# Altium PCB PCB3.PcbDoc (part 2 of 4)
Units mil, origin at the board's own origin, x right, y up, seen from the top; angles counter-clockwise.
Board outline 6000 x 4000 mil, 2 copper layers (Top Layer, Bottom Layer); 365 components, 395 nets, 1535 pads, 0 vias.
Unrouted connection lines stored in the file: 834.
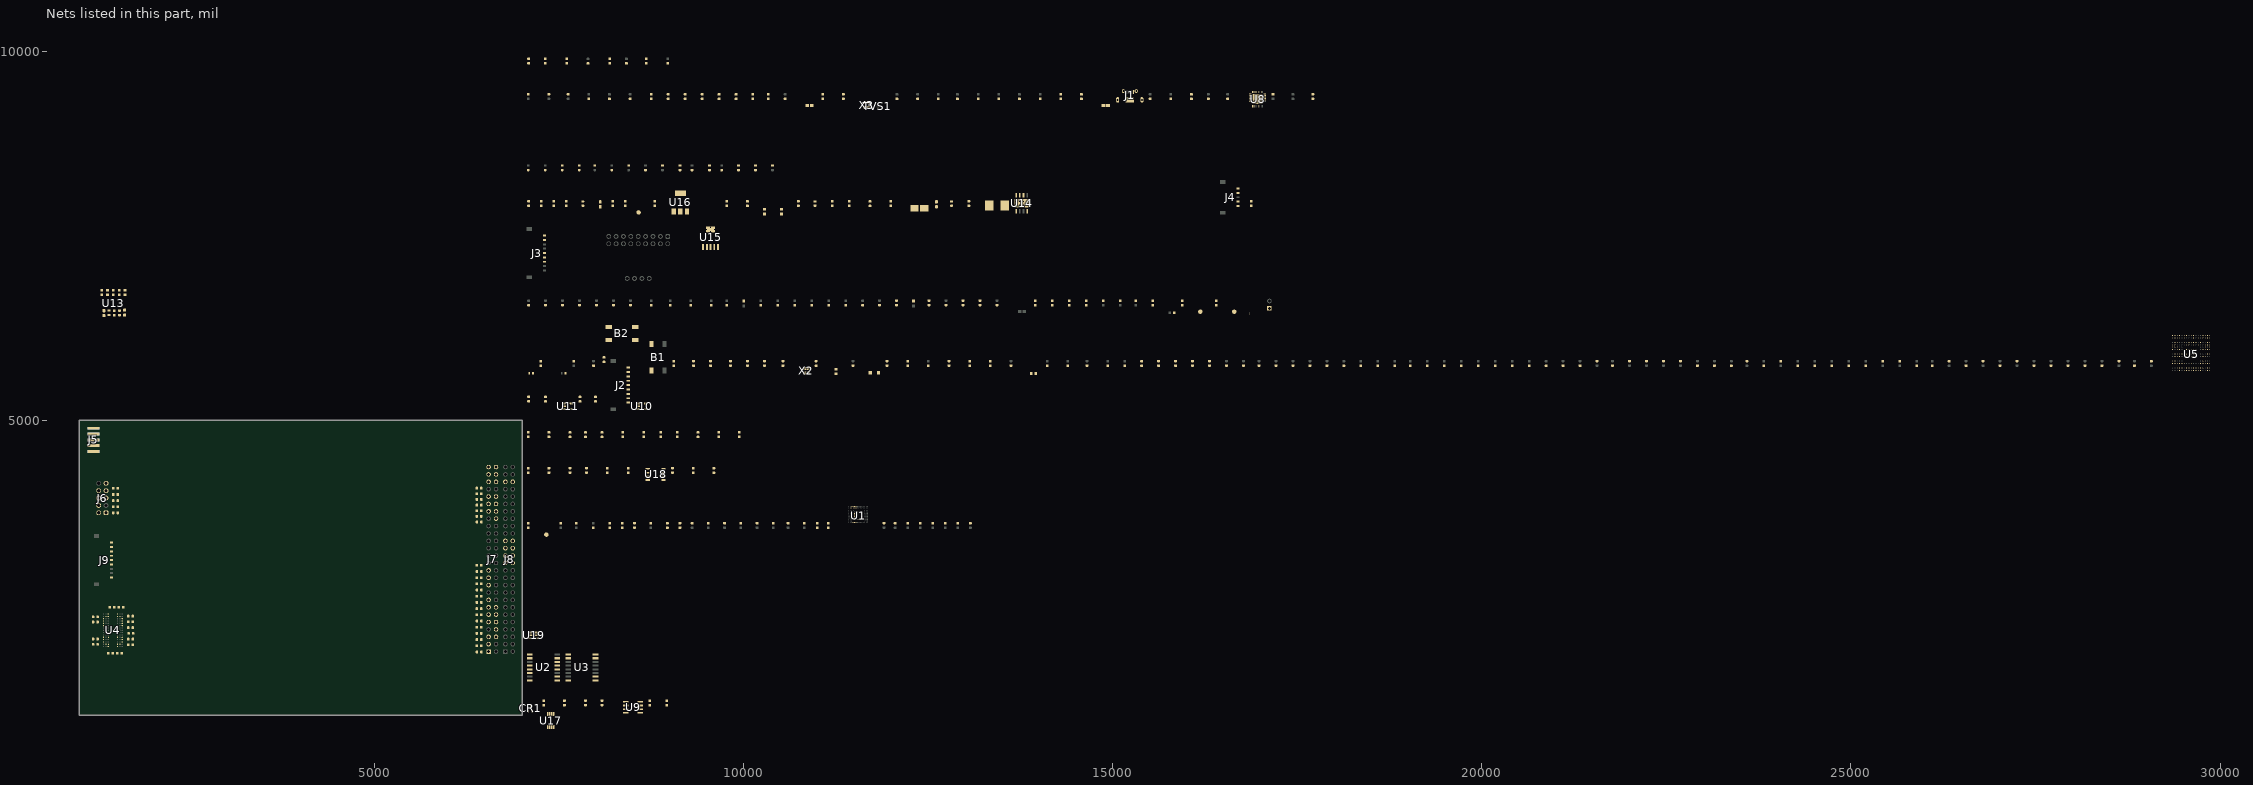
[diagram p2: the nets of this part, all layers, seen from the top]

## Footprints (in the part's own frame and the unit in brackets; to place one, negate y for a bottom-side part, rotate by r counter-clockwise, add the part's x,y. Pads: shape width x height; smd on the part's side, far side on the other; paste and mask are expansions set on the pad) (continued)
IC_TPS25974ARPWR [mm]
  rect 0.1x0.1 smd paste-1 mask+0: 1(-0.725,0.875) 2(-0.9,0.225) 3(-0.9,-0.225) 4(-0.725,-0.875) 5(-0.25,0) 6(0.25,0) 7(0.725,-0.875) 8(0.9,-0.225) 9(0.9,0.225) 10(0.725,0.875)
  Top Layer region: 1.158,-0.101 1.16,-0.101 1.163,-0.102 1.165,-0.102 1.168,-0.103 1.17,-0.104 1.173,-0.105 1.175,-0.107 1.177,-0.108 1.179,-0.11 1.181,-0.111 1.183,-0.113 1.185,-0.115 1.187,-0.117 1.189,-0.119 1.19,-0.121 1.192,-0.123 1.193,-0.125 1.195,-0.127 1.196,-0.13 1.197,-0.132 1.198,-0.135 1.198,-0.137 1.199,-0.14 1.199,-0.142 1.2,-0.145 1.2,-0.147 1.2,-0.15 1.2,-0.3 1.2,-0.303 1.2,-0.305 1.199,-0.308 1.199,-0.31 1.198,-0.313 1.198,-0.315 1.197,-0.318 1.196,-0.32 1.195,-0.323 1.193,-0.325 1.192,-0.327 1.19,-0.329 1.189,-0.331 1.187,-0.333 1.185,-0.335 1.183,-0.337 1.181,-0.339 1.179,-0.34 1.177,-0.342 1.175,-0.343 1.173,-0.345 1.17,-0.346 1.168,-0.347 1.165,-0.348 1.163,-0.348 1.16,-0.349 1.158,-0.349 1.155,-0.35 0.645,-0.35 0.642,-0.349 0.64,-0.349 0.637,-0.348 0.635,-0.348 0.632,-0.347 0.63,-0.346 0.627,-0.345 0.625,-0.343 0.623,-0.342 0.621,-0.34 0.619,-0.339 0.617,-0.337 0.615,-0.335 0.613,-0.333 0.611,-0.331 0.61,-0.329 0.608,-0.327 0.607,-0.325 0.605,-0.323 0.604,-0.32 0.603,-0.318 0.602,-0.315 0.602,-0.313 0.601,-0.31 0.601,-0.308 0.6,-0.305 0.6,-0.303 0.6,-0.3 0.6,-0.15 0.6,-0.147 0.6,-0.145 0.601,-0.142 0.601,-0.14 0.602,-0.137 0.602,-0.135 0.603,-0.132 0.604,-0.13 0.605,-0.127 0.607,-0.125 0.608,-0.123 0.61,-0.121 0.611,-0.119 0.613,-0.117 0.615,-0.115 0.617,-0.113 0.619,-0.111 0.621,-0.11 0.623,-0.108 0.625,-0.107 0.627,-0.105 0.63,-0.104 0.632,-0.103 0.635,-0.102 0.637,-0.102 0.64,-0.101 0.642,-0.101 0.645,-0.1 1.155,-0.1
  Top Layer region: 0.358,1.199 0.36,1.199 0.363,1.198 0.365,1.198 0.368,1.197 0.37,1.196 0.373,1.195 0.375,1.193 0.377,1.192 0.379,1.19 0.381,1.189 0.383,1.187 0.385,1.185 0.387,1.183 0.389,1.181 0.39,1.179 0.392,1.177 0.393,1.175 0.395,1.173 0.396,1.17 0.397,1.168 0.398,1.165 0.398,1.163 0.399,1.16 0.399,1.158 0.4,1.155 0.4,1.153 0.4,1.15 0.4,-1.15 0.4,-1.153 0.4,-1.155 0.399,-1.158 0.399,-1.16 0.398,-1.163 0.398,-1.165 0.397,-1.168 0.396,-1.17 0.395,-1.173 0.393,-1.175 0.392,-1.177 0.39,-1.179 0.389,-1.181 0.387,-1.183 0.385,-1.185 0.383,-1.187 0.381,-1.189 0.379,-1.19 0.377,-1.192 0.375,-1.193 0.373,-1.195 0.37,-1.196 0.368,-1.197 0.365,-1.198 0.363,-1.198 0.36,-1.199 0.358,-1.199 0.355,-1.2 0.145,-1.2 0.142,-1.199 0.14,-1.199 0.137,-1.198 0.135,-1.198 0.132,-1.197 0.13,-1.196 0.127,-1.195 0.125,-1.193 0.123,-1.192 0.121,-1.19 0.119,-1.189 0.117,-1.187 0.115,-1.185 0.113,-1.183 0.111,-1.181 0.11,-1.179 0.108,-1.177 0.107,-1.175 0.105,-1.173 0.104,-1.17 0.103,-1.168 0.102,-1.165 0.102,-1.163 0.101,-1.16 0.101,-1.158 0.1,-1.155 0.1,-1.153 0.1,-1.15 0.1,1.15 0.1,1.153 0.1,1.155 0.101,1.158 0.101,1.16 0.102,1.163 0.102,1.165 0.103,1.168 0.104,1.17 0.105,1.173 0.107,1.175 0.108,1.177 0.11,1.179 0.111,1.181 0.113,1.183 0.115,1.185 0.117,1.187 0.119,1.189 0.121,1.19 0.123,1.192 0.125,1.193 0.127,1.195 0.13,1.196 0.132,1.197 0.135,1.198 0.137,1.198 0.14,1.199 0.142,1.199 0.145,1.2 0.355,1.2
  Top Layer region: -0.142,1.199 -0.14,1.199 -0.137,1.198 -0.135,1.198 -0.132,1.197 -0.13,1.196 -0.127,1.195 -0.125,1.193 -0.123,1.192 -0.121,1.19 -0.119,1.189 -0.117,1.187 -0.115,1.185 -0.113,1.183 -0.111,1.181 -0.11,1.179 -0.108,1.177 -0.107,1.175 -0.105,1.173 -0.104,1.17 -0.103,1.168 -0.102,1.165 -0.102,1.163 -0.101,1.16 -0.101,1.158 -0.1,1.155 -0.1,1.153 -0.1,1.15 -0.1,-1.15 -0.1,-1.153 -0.1,-1.155 -0.101,-1.158 -0.101,-1.16 -0.102,-1.163 -0.102,-1.165 -0.103,-1.168 -0.104,-1.17 -0.105,-1.173 -0.107,-1.175 -0.108,-1.177 -0.11,-1.179 -0.111,-1.181 -0.113,-1.183 -0.115,-1.185 -0.117,-1.187 -0.119,-1.189 -0.121,-1.19 -0.123,-1.192 -0.125,-1.193 -0.127,-1.195 -0.13,-1.196 -0.132,-1.197 -0.135,-1.198 -0.137,-1.198 -0.14,-1.199 -0.142,-1.199 -0.145,-1.2 -0.355,-1.2 -0.358,-1.199 -0.36,-1.199 -0.363,-1.198 -0.365,-1.198 -0.368,-1.197 -0.37,-1.196 -0.373,-1.195 -0.375,-1.193 -0.377,-1.192 -0.379,-1.19 -0.381,-1.189 -0.383,-1.187 -0.385,-1.185 -0.387,-1.183 -0.389,-1.181 -0.39,-1.179 -0.392,-1.177 -0.393,-1.175 -0.395,-1.173 -0.396,-1.17 -0.397,-1.168 -0.398,-1.165 -0.398,-1.163 -0.399,-1.16 -0.399,-1.158 -0.4,-1.155 -0.4,-1.153 -0.4,-1.15 -0.4,1.15 -0.4,1.153 -0.4,1.155 -0.399,1.158 -0.399,1.16 -0.398,1.163 -0.398,1.165 -0.397,1.168 -0.396,1.17 -0.395,1.173 -0.393,1.175 -0.392,1.177 -0.39,1.179 -0.389,1.181 -0.387,1.183 -0.385,1.185 -0.383,1.187 -0.381,1.189 -0.379,1.19 -0.377,1.192 -0.375,1.193 -0.373,1.195 -0.37,1.196 -0.368,1.197 -0.365,1.198 -0.363,1.198 -0.36,1.199 -0.358,1.199 -0.355,1.2 -0.145,1.2
  Top Layer region: -0.642,-0.551 -0.64,-0.551 -0.637,-0.552 -0.635,-0.552 -0.632,-0.553 -0.63,-0.554 -0.627,-0.555 -0.625,-0.557 -0.623,-0.558 -0.621,-0.56 -0.619,-0.561 -0.617,-0.563 -0.615,-0.565 -0.613,-0.567 -0.611,-0.569 -0.61,-0.571 -0.608,-0.573 -0.607,-0.575 -0.605,-0.577 -0.604,-0.58 -0.603,-0.582 -0.602,-0.585 -0.602,-0.587 -0.601,-0.59 -0.601,-0.592 -0.6,-0.595 -0.6,-0.597 -0.6,-0.6 -0.6,-1.15 -0.6,-1.153 -0.6,-1.155 -0.601,-1.158 -0.601,-1.16 -0.602,-1.163 -0.602,-1.165 -0.603,-1.168 -0.604,-1.17 -0.605,-1.173 -0.607,-1.175 -0.608,-1.177 -0.61,-1.179 -0.611,-1.181 -0.613,-1.183 -0.615,-1.185 -0.617,-1.187 -0.619,-1.189 -0.621,-1.19 -0.623,-1.192 -0.625,-1.193 -0.627,-1.195 -0.63,-1.196 -0.632,-1.197 -0.635,-1.198 -0.637,-1.198 -0.64,-1.199 -0.642,-1.199 -0.645,-1.2 -0.805,-1.2 -0.808,-1.199 -0.81,-1.199 -0.813,-1.198 -0.815,-1.198 -0.818,-1.197 -0.82,-1.196 -0.823,-1.195 -0.825,-1.193 -0.827,-1.192 -0.829,-1.19 -0.831,-1.189 -0.833,-1.187 -0.835,-1.185 -0.837,-1.183 -0.839,-1.181 -0.84,-1.179 -0.842,-1.177 -0.843,-1.175 -0.845,-1.173 -0.846,-1.17 -0.847,-1.168 -0.848,-1.165 -0.848,-1.163 -0.849,-1.16 -0.849,-1.158 -0.85,-1.155 -0.85,-1.153 -0.85,-1.15 -0.85,-0.85 -1.155,-0.85 -1.158,-0.849 -1.16,-0.849 -1.163,-0.848 -1.165,-0.848 -1.168,-0.847 -1.17,-0.846 -1.173,-0.845 -1.175,-0.843 -1.177,-0.842 -1.179,-0.84 -1.181,-0.839 -1.183,-0.837 -1.185,-0.835 -1.187,-0.833 -1.189,-0.831 -1.19,-0.829 -1.192,-0.827 -1.193,-0.825 -1.195,-0.823 -1.196,-0.82 -1.197,-0.818 -1.198,-0.815 -1.198,-0.813 -1.199,-0.81 -1.199,-0.808 -1.2,-0.805 -1.2,-0.803 -1.2,-0.8 -1.2,-0.6 -1.2,-0.597 -1.2,-0.595 -1.199,-0.592 -1.199,-0.59 -1.198,-0.587 -1.198,-0.585 -1.197,-0.582 -1.196,-0.58 -1.195,-0.577 -1.193,-0.575 -1.192,-0.573 -1.19,-0.571 -1.189,-0.569 -1.187,-0.567 -1.185,-0.565 -1.183,-0.563 -1.181,-0.561 -1.179,-0.56 -1.177,-0.558 -1.175,-0.557 -1.173,-0.555 -1.17,-0.554 -1.168,-0.553 -1.165,-0.552 -1.163,-0.552 -1.16,-0.551 -1.158,-0.551 -1.155,-0.55 -0.645,-0.55
  Top Layer region: 0.808,1.199 0.81,1.199 0.813,1.198 0.815,1.198 0.818,1.197 0.82,1.196 0.823,1.195 0.825,1.193 0.827,1.192 0.829,1.19 0.831,1.189 0.833,1.187 0.835,1.185 0.837,1.183 0.839,1.181 0.84,1.179 0.842,1.177 0.843,1.175 0.845,1.173 0.846,1.17 0.847,1.168 0.848,1.165 0.848,1.163 0.849,1.16 0.849,1.158 0.85,1.155 0.85,1.153 0.85,1.15 0.85,0.85 1.155,0.85 1.158,0.849 1.16,0.849 1.163,0.848 1.165,0.848 1.168,0.847 1.17,0.846 1.173,0.845 1.175,0.843 1.177,0.842 1.179,0.84 1.181,0.839 1.183,0.837 1.185,0.835 1.187,0.833 1.189,0.831 1.19,0.829 1.192,0.827 1.193,0.825 1.195,0.823 1.196,0.82 1.197,0.818 1.198,0.815 1.198,0.813 1.199,0.81 1.199,0.808 1.2,0.805 1.2,0.803 1.2,0.8 1.2,0.6 1.2,0.597 1.2,0.595 1.199,0.592 1.199,0.59 1.198,0.587 1.198,0.585 1.197,0.582 1.196,0.58 1.195,0.577 1.193,0.575 1.192,0.573 1.19,0.571 1.189,0.569 1.187,0.567 1.185,0.565 1.183,0.563 1.181,0.561 1.179,0.56 1.177,0.558 1.175,0.557 1.173,0.555 1.17,0.554 1.168,0.553 1.165,0.552 1.163,0.552 1.16,0.551 1.158,0.551 1.155,0.55 0.645,0.55 0.642,0.551 0.64,0.551 0.637,0.552 0.635,0.552 0.632,0.553 0.63,0.554 0.627,0.555 0.625,0.557 0.623,0.558 0.621,0.56 0.619,0.561 0.617,0.563 0.615,0.565 0.613,0.567 0.611,0.569 0.61,0.571 0.608,0.573 0.607,0.575 0.605,0.577 0.604,0.58 0.603,0.582 0.602,0.585 0.602,0.587 0.601,0.59 0.601,0.592 0.6,0.595 0.6,0.597 0.6,0.6 0.6,1.15 0.6,1.153 0.6,1.155 0.601,1.158 0.601,1.16 0.602,1.163 0.602,1.165 0.603,1.168 0.604,1.17 0.605,1.173 0.607,1.175 0.608,1.177 0.61,1.179 0.611,1.181 0.613,1.183 0.615,1.185 0.617,1.187 0.619,1.189 0.621,1.19 0.623,1.192 0.625,1.193 0.627,1.195 0.63,1.196 0.632,1.197 0.635,1.198 0.637,1.198 0.64,1.199 0.642,1.199 0.645,1.2 0.805,1.2
  Top Layer region: 1.158,-0.551 1.16,-0.551 1.163,-0.552 1.165,-0.552 1.168,-0.553 1.17,-0.554 1.173,-0.555 1.175,-0.557 1.177,-0.558 1.179,-0.56 1.181,-0.561 1.183,-0.563 1.185,-0.565 1.187,-0.567 1.189,-0.569 1.19,-0.571 1.192,-0.573 1.193,-0.575 1.195,-0.577 1.196,-0.58 1.197,-0.582 1.198,-0.585 1.198,-0.587 1.199,-0.59 1.199,-0.592 1.2,-0.595 1.2,-0.597 1.2,-0.6 1.2,-0.8 1.2,-0.803 1.2,-0.805 1.199,-0.808 1.199,-0.81 1.198,-0.813 1.198,-0.815 1.197,-0.818 1.196,-0.82 1.195,-0.823 1.193,-0.825 1.192,-0.827 1.19,-0.829 1.189,-0.831 1.187,-0.833 1.185,-0.835 1.183,-0.837 1.181,-0.839 1.179,-0.84 1.177,-0.842 1.175,-0.843 1.173,-0.845 1.17,-0.846 1.168,-0.847 1.165,-0.848 1.163,-0.848 1.16,-0.849 1.158,-0.849 1.155,-0.85 0.85,-0.85 0.85,-1.15 0.85,-1.153 0.85,-1.155 0.849,-1.158 0.849,-1.16 0.848,-1.163 0.848,-1.165 0.847,-1.168 0.846,-1.17 0.845,-1.173 0.843,-1.175 0.842,-1.177 0.84,-1.179 0.839,-1.181 0.837,-1.183 0.835,-1.185 0.833,-1.187 0.831,-1.189 0.829,-1.19 0.827,-1.192 0.825,-1.193 0.823,-1.195 0.82,-1.196 0.818,-1.197 0.815,-1.198 0.813,-1.198 0.81,-1.199 0.808,-1.199 0.805,-1.2 0.645,-1.2 0.642,-1.199 0.64,-1.199 0.637,-1.198 0.635,-1.198 0.632,-1.197 0.63,-1.196 0.627,-1.195 0.625,-1.193 0.623,-1.192 0.621,-1.19 0.619,-1.189 0.617,-1.187 0.615,-1.185 0.613,-1.183 0.611,-1.181 0.61,-1.179 0.608,-1.177 0.607,-1.175 0.605,-1.173 0.604,-1.17 0.603,-1.168 0.602,-1.165 0.602,-1.163 0.601,-1.16 0.601,-1.158 0.6,-1.155 0.6,-1.153 0.6,-1.15 0.6,-0.6 0.6,-0.597 0.6,-0.595 0.601,-0.592 0.601,-0.59 0.602,-0.587 0.602,-0.585 0.603,-0.582 0.604,-0.58 0.605,-0.577 0.607,-0.575 0.608,-0.573 0.61,-0.571 0.611,-0.569 0.613,-0.567 0.615,-0.565 0.617,-0.563 0.619,-0.561 0.621,-0.56 0.623,-0.558 0.625,-0.557 0.627,-0.555 0.63,-0.554 0.632,-0.553 0.635,-0.552 0.637,-0.552 0.64,-0.551 0.642,-0.551 0.645,-0.55 1.155,-0.55
  Top Layer region: -0.642,1.199 -0.64,1.199 -0.637,1.198 -0.635,1.198 -0.632,1.197 -0.63,1.196 -0.627,1.195 -0.625,1.193 -0.623,1.192 -0.621,1.19 -0.619,1.189 -0.617,1.187 -0.615,1.185 -0.613,1.183 -0.611,1.181 -0.61,1.179 -0.608,1.177 -0.607,1.175 -0.605,1.173 -0.604,1.17 -0.603,1.168 -0.602,1.165 -0.602,1.163 -0.601,1.16 -0.601,1.158 -0.6,1.155 -0.6,1.153 -0.6,1.15 -0.6,0.6 -0.6,0.597 -0.6,0.595 -0.601,0.592 -0.601,0.59 -0.602,0.587 -0.602,0.585 -0.603,0.582 -0.604,0.58 -0.605,0.577 -0.607,0.575 -0.608,0.573 -0.61,0.571 -0.611,0.569 -0.613,0.567 -0.615,0.565 -0.617,0.563 -0.619,0.561 -0.621,0.56 -0.623,0.558 -0.625,0.557 -0.627,0.555 -0.63,0.554 -0.632,0.553 -0.635,0.552 -0.637,0.552 -0.64,0.551 -0.642,0.551 -0.645,0.55 -1.155,0.55 -1.158,0.551 -1.16,0.551 -1.163,0.552 -1.165,0.552 -1.168,0.553 -1.17,0.554 -1.173,0.555 -1.175,0.557 -1.177,0.558 -1.179,0.56 -1.181,0.561 -1.183,0.563 -1.185,0.565 -1.187,0.567 -1.189,0.569 -1.19,0.571 -1.192,0.573 -1.193,0.575 -1.195,0.577 -1.196,0.58 -1.197,0.582 -1.198,0.585 -1.198,0.587 -1.199,0.59 -1.199,0.592 -1.2,0.595 -1.2,0.597 -1.2,0.6 -1.2,0.8 -1.2,0.803 -1.2,0.805 -1.199,0.808 -1.199,0.81 -1.198,0.813 -1.198,0.815 -1.197,0.818 -1.196,0.82 -1.195,0.823 -1.193,0.825 -1.192,0.827 -1.19,0.829 -1.189,0.831 -1.187,0.833 -1.185,0.835 -1.183,0.837 -1.181,0.839 -1.179,0.84 -1.177,0.842 -1.175,0.843 -1.173,0.845 -1.17,0.846 -1.168,0.847 -1.165,0.848 -1.163,0.848 -1.16,0.849 -1.158,0.849 -1.155,0.85 -0.85,0.85 -0.85,1.15 -0.85,1.153 -0.85,1.155 -0.849,1.158 -0.849,1.16 -0.848,1.163 -0.848,1.165 -0.847,1.168 -0.846,1.17 -0.845,1.173 -0.843,1.175 -0.842,1.177 -0.84,1.179 -0.839,1.181 -0.837,1.183 -0.835,1.185 -0.833,1.187 -0.831,1.189 -0.829,1.19 -0.827,1.192 -0.825,1.193 -0.823,1.195 -0.82,1.196 -0.818,1.197 -0.815,1.198 -0.813,1.198 -0.81,1.199 -0.808,1.199 -0.805,1.2 -0.645,1.2
  Top Layer region: 1.158,0.349 1.16,0.349 1.163,0.348 1.165,0.348 1.168,0.347 1.17,0.346 1.173,0.345 1.175,0.343 1.177,0.342 1.179,0.34 1.181,0.339 1.183,0.337 1.185,0.335 1.187,0.333 1.189,0.331 1.19,0.329 1.192,0.327 1.193,0.325 1.195,0.323 1.196,0.32 1.197,0.318 1.198,0.315 1.198,0.313 1.199,0.31 1.199,0.308 1.2,0.305 1.2,0.303 1.2,0.3 1.2,0.15 1.2,0.147 1.2,0.145 1.199,0.142 1.199,0.14 1.198,0.137 1.198,0.135 1.197,0.132 1.196,0.13 1.195,0.127 1.193,0.125 1.192,0.123 1.19,0.121 1.189,0.119 1.187,0.117 1.185,0.115 1.183,0.113 1.181,0.111 1.179,0.11 1.177,0.108 1.175,0.107 1.173,0.105 1.17,0.104 1.168,0.103 1.165,0.102 1.163,0.102 1.16,0.101 1.158,0.101 1.155,0.1 0.645,0.1 0.642,0.101 0.64,0.101 0.637,0.102 0.635,0.102 0.632,0.103 0.63,0.104 0.627,0.105 0.625,0.107 0.623,0.108 0.621,0.11 0.619,0.111 0.617,0.113 0.615,0.115 0.613,0.117 0.611,0.119 0.61,0.121 0.608,0.123 0.607,0.125 0.605,0.127 0.604,0.13 0.603,0.132 0.602,0.135 0.602,0.137 0.601,0.14 0.601,0.142 0.6,0.145 0.6,0.147 0.6,0.15 0.6,0.3 0.6,0.303 0.6,0.305 0.601,0.308 0.601,0.31 0.602,0.313 0.602,0.315 0.603,0.318 0.604,0.32 0.605,0.323 0.607,0.325 0.608,0.327 0.61,0.329 0.611,0.331 0.613,0.333 0.615,0.335 0.617,0.337 0.619,0.339 0.621,0.34 0.623,0.342 0.625,0.343 0.627,0.345 0.63,0.346 0.632,0.347 0.635,0.348 0.637,0.348 0.64,0.349 0.642,0.349 0.645,0.35 1.155,0.35
  Top Layer region: -0.642,-0.101 -0.64,-0.101 -0.637,-0.102 -0.635,-0.102 -0.632,-0.103 -0.63,-0.104 -0.627,-0.105 -0.625,-0.107 -0.623,-0.108 -0.621,-0.11 -0.619,-0.111 -0.617,-0.113 -0.615,-0.115 -0.613,-0.117 -0.611,-0.119 -0.61,-0.121 -0.608,-0.123 -0.607,-0.125 -0.605,-0.127 -0.604,-0.13 -0.603,-0.132 -0.602,-0.135 -0.602,-0.137 -0.601,-0.14 -0.601,-0.142 -0.6,-0.145 -0.6,-0.147 -0.6,-0.15 -0.6,-0.3 -0.6,-0.303 -0.6,-0.305 -0.601,-0.308 -0.601,-0.31 -0.602,-0.313 -0.602,-0.315 -0.603,-0.318 -0.604,-0.32 -0.605,-0.323 -0.607,-0.325 -0.608,-0.327 -0.61,-0.329 -0.611,-0.331 -0.613,-0.333 -0.615,-0.335 -0.617,-0.337 -0.619,-0.339 -0.621,-0.34 -0.623,-0.342 -0.625,-0.343 -0.627,-0.345 -0.63,-0.346 -0.632,-0.347 -0.635,-0.348 -0.637,-0.348 -0.64,-0.349 -0.642,-0.349 -0.645,-0.35 -1.155,-0.35 -1.158,-0.349 -1.16,-0.349 -1.163,-0.348 -1.165,-0.348 -1.168,-0.347 -1.17,-0.346 -1.173,-0.345 -1.175,-0.343 -1.177,-0.342 -1.179,-0.34 -1.181,-0.339 -1.183,-0.337 -1.185,-0.335 -1.187,-0.333 -1.189,-0.331 -1.19,-0.329 -1.192,-0.327 -1.193,-0.325 -1.195,-0.323 -1.196,-0.32 -1.197,-0.318 -1.198,-0.315 -1.198,-0.313 -1.199,-0.31 -1.199,-0.308 -1.2,-0.305 -1.2,-0.303 -1.2,-0.3 -1.2,-0.15 -1.2,-0.147 -1.2,-0.145 -1.199,-0.142 -1.199,-0.14 -1.198,-0.137 -1.198,-0.135 -1.197,-0.132 -1.196,-0.13 -1.195,-0.127 -1.193,-0.125 -1.192,-0.123 -1.19,-0.121 -1.189,-0.119 -1.187,-0.117 -1.185,-0.115 -1.183,-0.113 -1.181,-0.111 -1.179,-0.11 -1.177,-0.108 -1.175,-0.107 -1.173,-0.105 -1.17,-0.104 -1.168,-0.103 -1.165,-0.102 -1.163,-0.102 -1.16,-0.101 -1.158,-0.101 -1.155,-0.1 -0.645,-0.1
  Top Layer region: -0.642,0.349 -0.64,0.349 -0.637,0.348 -0.635,0.348 -0.632,0.347 -0.63,0.346 -0.627,0.345 -0.625,0.343 -0.623,0.342 -0.621,0.34 -0.619,0.339 -0.617,0.337 -0.615,0.335 -0.613,0.333 -0.611,0.331 -0.61,0.329 -0.608,0.327 -0.607,0.325 -0.605,0.323 -0.604,0.32 -0.603,0.318 -0.602,0.315 -0.602,0.313 -0.601,0.31 -0.601,0.308 -0.6,0.305 -0.6,0.303 -0.6,0.3 -0.6,0.15 -0.6,0.147 -0.6,0.145 -0.601,0.142 -0.601,0.14 -0.602,0.137 -0.602,0.135 -0.603,0.132 -0.604,0.13 -0.605,0.127 -0.607,0.125 -0.608,0.123 -0.61,0.121 -0.611,0.119 -0.613,0.117 -0.615,0.115 -0.617,0.113 -0.619,0.111 -0.621,0.11 -0.623,0.108 -0.625,0.107 -0.627,0.105 -0.63,0.104 -0.632,0.103 -0.635,0.102 -0.637,0.102 -0.64,0.101 -0.642,0.101 -0.645,0.1 -1.155,0.1 -1.158,0.101 -1.16,0.101 -1.163,0.102 -1.165,0.102 -1.168,0.103 -1.17,0.104 -1.173,0.105 -1.175,0.107 -1.177,0.108 -1.179,0.11 -1.181,0.111 -1.183,0.113 -1.185,0.115 -1.187,0.117 -1.189,0.119 -1.19,0.121 -1.192,0.123 -1.193,0.125 -1.195,0.127 -1.196,0.13 -1.197,0.132 -1.198,0.135 -1.198,0.137 -1.199,0.14 -1.199,0.142 -1.2,0.145 -1.2,0.147 -1.2,0.15 -1.2,0.3 -1.2,0.303 -1.2,0.305 -1.199,0.308 -1.199,0.31 -1.198,0.313 -1.198,0.315 -1.197,0.318 -1.196,0.32 -1.195,0.323 -1.193,0.325 -1.192,0.327 -1.19,0.329 -1.189,0.331 -1.187,0.333 -1.185,0.335 -1.183,0.337 -1.181,0.339 -1.179,0.34 -1.177,0.342 -1.175,0.343 -1.173,0.345 -1.17,0.346 -1.168,0.347 -1.165,0.348 -1.163,0.348 -1.16,0.349 -1.158,0.349 -1.155,0.35 -0.645,0.35
  silkscreen extent -2,-1.3 1.3,1.3, body extent -1,-1 1,1, height 1
INDC1608X95N [mm]
  rrect30% 0.9x0.97 smd: 1(-0.785,0) 2(0.785,0)
  silkscreen extent -0.8,-0.66 0.8,0.66, body extent -0.8,-0.4 0.8,0.4, height 0.95
JCET-SMB-2_M [mm] "Molded Diode, 2-Leads, Body 4.57x3.94mm"
  rect 2.85x2.25 smd: 1(-1.675,0) 2(1.675,0)
  silkscreen extent -2.3,-2 3.6,2, body extent -2.5,-1.97 2.5,1.97, height 2.44
LED-0603-GREEN [mm]
  rect 0.9x1 smd: 1(-0.8,0) 2(0.8,0)
  silkscreen extent -1.27,-0.58 1.27,0.58, body extent -0.81,-0.5 0.81,0.5, height 0.98
LED-0603-RED [mm]
  rect 0.9x1 smd: 1(-0.8,0) 2(0.8,0)
  silkscreen extent -1.27,-0.58 1.27,0.58, body extent -0.81,-0.5 0.81,0.5, height 0.98
MODULE_FPGA [mm]
  rrect50% 1.65x1.65 hole 1.1: 1(-1.524,-7.112)
  round 1.65 hole 1.1: 2(-1.524,-4.572) 3(1.016,-7.112) 4(1.016,-4.572) 5(3.556,-7.112) 6(3.556,-4.572) 7(6.096,-7.112) 8(6.096,-4.572) 9(8.636,-7.112) 10(8.636,-4.572) 11(11.176,-7.112) 12(11.176,-4.572) 13(13.716,-7.112) 14(13.716,-4.572) 15(16.256,-7.112) 16(16.256,-4.572) 17(18.796,-7.112) 18(18.796,-4.572) 19(4.826,7.366) 20(7.366,7.366) 21(9.906,7.366) 22(12.446,7.366)
  Keep-Out Layer region: -8.331,-8.255 -8.331,8.509 25.451,8.509 25.451,-8.255
  silkscreen extent -8.33,-9.22 25.45,8.51
MOLEX_47590-0001 [mm]
  rect 0.4x1.35 smd mask+0.07: 1(1.3,2.675) 2(0.65,2.675) 3(0,2.675) 4(-0.65,2.675) 5(-1.3,2.675)
  oval 1x1.9 hole 0.65 slot 1.35 at 90 deg mask+0: SH1(-4.175,0) SH2(4.175,0)
  oval 1.1x1.3 hole 0.7 slot 0.9 at 90 deg mask+0.1: SH3(-2.225,3) SH4(2.225,3)
  rect 2.9x1.9 smd: SH5(0,0)
  Top Layer region: -3.3,-0.95 -4.075,-0.95 -4.106,-0.949 -4.138,-0.947 -4.169,-0.943 -4.2,-0.937 -4.23,-0.93 -4.26,-0.921 -4.29,-0.91 -4.319,-0.898 -4.347,-0.885 -4.375,-0.87 -4.402,-0.853 -4.428,-0.835 -4.453,-0.816 -4.476,-0.796 -4.499,-0.774 -4.521,-0.751 -4.541,-0.728 -4.56,-0.703 -4.578,-0.677 -4.595,-0.65 -4.61,-0.622 -4.623,-0.594 -4.635,-0.565 -4.646,-0.535 -4.655,-0.505 -4.662,-0.475 -4.668,-0.444 -4.672,-0.413 -4.674,-0.381 -4.675,-0.35 -4.675,0.35 -4.674,0.381 -4.672,0.413 -4.668,0.444 -4.662,0.475 -4.655,0.505 -4.646,0.535 -4.635,0.565 -4.623,0.594 -4.61,0.622 -4.595,0.65 -4.578,0.677 -4.56,0.703 -4.541,0.728 -4.521,0.751 -4.499,0.774 -4.476,0.796 -4.453,0.816 -4.428,0.835 -4.402,0.853 -4.375,0.87 -4.347,0.885 -4.319,0.898 -4.29,0.91 -4.26,0.921 -4.23,0.93 -4.2,0.937 -4.169,0.943 -4.138,0.947 -4.106,0.949 -4.075,0.95 -3.3,0.95
  Top Layer region: 4.106,0.949 4.138,0.947 4.169,0.943 4.2,0.937 4.23,0.93 4.26,0.921 4.29,0.91 4.319,0.898 4.347,0.885 4.375,0.87 4.402,0.853 4.428,0.835 4.453,0.816 4.476,0.796 4.499,0.774 4.521,0.751 4.541,0.728 4.56,0.703 4.578,0.677 4.595,0.65 4.61,0.622 4.623,0.594 4.635,0.565 4.646,0.535 4.655,0.505 4.662,0.475 4.668,0.444 4.672,0.413 4.674,0.381 4.675,0.35 4.675,-0.35 4.674,-0.381 4.672,-0.413 4.668,-0.444 4.662,-0.475 4.655,-0.505 4.646,-0.535 4.635,-0.565 4.623,-0.594 4.61,-0.622 4.595,-0.65 4.578,-0.677 4.56,-0.703 4.541,-0.728 4.521,-0.751 4.499,-0.774 4.476,-0.796 4.453,-0.816 4.428,-0.835 4.402,-0.853 4.375,-0.87 4.347,-0.885 4.319,-0.898 4.29,-0.91 4.26,-0.921 4.23,-0.93 4.2,-0.937 4.169,-0.943 4.138,-0.947 4.106,-0.949 4.075,-0.95 3.3,-0.95 3.3,0.95 4.075,0.95
  Bottom Layer region: -3.3,-0.95 -4.075,-0.95 -4.106,-0.949 -4.138,-0.947 -4.169,-0.943 -4.2,-0.937 -4.23,-0.93 -4.26,-0.921 -4.29,-0.91 -4.319,-0.898 -4.347,-0.885 -4.375,-0.87 -4.402,-0.853 -4.428,-0.835 -4.453,-0.816 -4.476,-0.796 -4.499,-0.774 -4.521,-0.751 -4.541,-0.728 -4.56,-0.703 -4.578,-0.677 -4.595,-0.65 -4.61,-0.622 -4.623,-0.594 -4.635,-0.565 -4.646,-0.535 -4.655,-0.505 -4.662,-0.475 -4.668,-0.444 -4.672,-0.413 -4.674,-0.381 -4.675,-0.35 -4.675,0.35 -4.674,0.381 -4.672,0.413 -4.668,0.444 -4.662,0.475 -4.655,0.505 -4.646,0.535 -4.635,0.565 -4.623,0.594 -4.61,0.622 -4.595,0.65 -4.578,0.677 -4.56,0.703 -4.541,0.728 -4.521,0.751 -4.499,0.774 -4.476,0.796 -4.453,0.816 -4.428,0.835 -4.402,0.853 -4.375,0.87 -4.347,0.885 -4.319,0.898 -4.29,0.91 -4.26,0.921 -4.23,0.93 -4.2,0.937 -4.169,0.943 -4.138,0.947 -4.106,0.949 -4.075,0.95 -3.3,0.95
  Bottom Layer region: 4.106,0.949 4.138,0.947 4.169,0.943 4.2,0.937 4.23,0.93 4.26,0.921 4.29,0.91 4.319,0.898 4.347,0.885 4.375,0.87 4.402,0.853 4.428,0.835 4.453,0.816 4.476,0.796 4.499,0.774 4.521,0.751 4.541,0.728 4.56,0.703 4.578,0.677 4.595,0.65 4.61,0.622 4.623,0.594 4.635,0.565 4.646,0.535 4.655,0.505 4.662,0.475 4.668,0.444 4.672,0.413 4.674,0.381 4.675,0.35 4.675,-0.35 4.674,-0.381 4.672,-0.413 4.668,-0.444 4.662,-0.475 4.655,-0.505 4.646,-0.535 4.635,-0.565 4.623,-0.594 4.61,-0.622 4.595,-0.65 4.578,-0.677 4.56,-0.703 4.541,-0.728 4.521,-0.751 4.499,-0.774 4.476,-0.796 4.453,-0.816 4.428,-0.835 4.402,-0.853 4.375,-0.87 4.347,-0.885 4.319,-0.898 4.29,-0.91 4.26,-0.921 4.23,-0.93 4.2,-0.937 4.169,-0.943 4.138,-0.947 4.106,-0.949 4.075,-0.95 3.3,-0.95 3.3,0.95 4.075,0.95
  Keep-Out Layer board cut-out: 3.75,-1.45 -3.75,-1.45 -2.8,-1.45 -2.8,0.125 -2.799,0.147 -2.798,0.169 -2.795,0.191 -2.791,0.213 -2.786,0.235 -2.779,0.256 -2.772,0.277 -2.763,0.298 -2.754,0.318 -2.743,0.338 -2.731,0.356 -2.719,0.375 -2.705,0.392 -2.691,0.409 -2.676,0.426 -2.659,0.441 -2.642,0.455 -2.625,0.469 -2.606,0.481 -2.587,0.493 -2.568,0.504 -2.548,0.513 -2.527,0.522 -2.506,0.529 -2.485,0.536 -2.463,0.541 -2.441,0.545 -2.419,0.548 -2.397,0.549 -2.375,0.55 -2.353,0.549 -2.331,0.548 -2.309,0.545 -2.287,0.541 -2.265,0.536 -2.244,0.529 -2.223,0.522 -2.202,0.513 -2.182,0.504 -2.163,0.493 -2.144,0.481 -2.125,0.469 -2.108,0.455 -2.091,0.441 -2.074,0.426 -2.059,0.409 -2.045,0.392 -2.031,0.375 -2.019,0.356 -2.007,0.337 -1.996,0.318 -1.987,0.298 -1.978,0.277 -1.971,0.256 -1.964,0.235 -1.959,0.213 -1.955,0.191 -1.952,0.169 -1.951,0.147 -1.95,0.125 -1.95,-1.45 1.95,-1.45 1.95,0.125 1.951,0.147 1.952,0.169 1.955,0.191 1.959,0.213 1.964,0.235 1.971,0.256 1.978,0.277 1.987,0.298 1.996,0.318 2.007,0.337 2.019,0.356 2.031,0.375 2.045,0.392 2.059,0.409 2.074,0.426 2.091,0.441 2.108,0.455 2.125,0.469 2.144,0.481 2.163,0.493 2.182,0.504 2.202,0.513 2.223,0.522 2.244,0.529 2.265,0.536 2.287,0.541 2.309,0.545 2.331,0.548 2.353,0.549 2.375,0.55 2.397,0.549 2.419,0.548 2.441,0.545 2.463,0.541 2.485,0.536 2.506,0.529 2.527,0.522 2.548,0.513 2.568,0.504 2.587,0.493 2.606,0.481 2.625,0.469 2.642,0.455 2.659,0.441 2.676,0.426 2.691,0.409 2.705,0.392 2.719,0.375 2.731,0.356 2.743,0.338 2.754,0.318 2.763,0.298 2.772,0.277 2.779,0.256 2.786,0.235 2.791,0.213 2.795,0.191 2.798,0.169 2.799,0.147 2.8,0.125 2.8,-1.45
  silkscreen extent -3.75,1.27 3.75,4.45, body extent -4.33,-2.75 4.33,3.15, height 2.73
NSC5004D-25M [mil] "25 MHz XO (Standard) CMOS Oscillator 3.3V Standby (Power Down) 4-SMD, No Lead"
  rect 39x39 smd paste+0 mask+0: 1(-24.61,32.48) 2(-24.61,-32.48) 3(24.61,-32.48) 4(24.61,32.48)
  silkscreen extent -70,30 -60,40, body extent -41,-51 41,51, height 35
QFN32_5X5MC_MCH [mil]
  rect 32x10 smd paste+0 mask+0: 1(-96.5,70) 2(-96.5,50) 3(-96.5,30) 4(-96.5,10) 5(-96.5,-10) 6(-96.5,-30) 7(-96.5,-50) 8(-96.5,-70) 17(96.5,-70) 18(96.5,-50) 19(96.5,-30) 20(96.5,-10) 21(96.5,10) 22(96.5,30) 23(96.5,50) 24(96.5,70)
  rect 10x32 smd paste+0 mask+0: 9(-70,-96.5) 10(-50,-96.5) 11(-30,-96.5) 12(-10,-96.5) 13(10,-96.5) 14(30,-96.5) 15(50,-96.5) 16(70,-96.5) 25(70,96.5) 26(50,96.5) 27(30,96.5) 28(10,96.5) 29(-10,96.5) 30(-30,96.5) 31(-50,96.5) 32(-70,96.5)
  rect 134x134 smd paste-66.5 mask-66.5: 33(0,0)
  silkscreen extent -145,-132 132,132, body extent -101,-101 101,101, height 65
RES_C_1608X60 [mm] "Chip Resistor, 2-Leads, Body 1.63x0.83mm, IPC High Density"
  rrect50% 0.85x0.95 smd: 1(-0.775,0) 2(0.775,0)
  silkscreen extent -0.9,-0.7 0.9,0.7, body extent -0.87,-0.48 0.87,0.48, height 0.6
SOIC8_150MIL_N_ISI [mil]
  rect 57.5x22 smd paste+0 mask+0: 1(-107.25,75) 2(-107.25,25) 3(-107.25,-25) 4(-107.25,-75) 5(107.25,-75) 6(107.25,-25) 7(107.25,25) 8(107.25,75)
  silkscreen extent -168,-104 84,104, body extent -122,-99 122,99, height 69
SOIC127P599X175-8N [mm] "SN65HVD230DR"
  rrect25% 1.97x0.6 smd: 1(-2.47,1.905) 2(-2.47,0.635) 3(-2.47,-0.635) 4(-2.47,-1.905) 5(2.47,-1.905) 6(2.47,-0.635) 7(2.47,0.635) 8(2.47,1.905)
  silkscreen extent -4.14,-2.52 1.95,2.52, body extent -3,-2.45 3,2.45, height 1.75
SOIC127P1032X265-16N [mm]
  rect 1.925x0.7 smd: 1(-4.712,4.445) 2(-4.712,3.175) 3(-4.712,1.905) 4(-4.712,0.635) 5(-4.712,-0.635) 6(-4.712,-1.905) 7(-4.712,-3.175) 8(-4.712,-4.445) 9(4.712,-4.445) 10(4.712,-3.175) 11(4.712,-1.905) 12(4.712,-0.635) 13(4.712,0.635) 14(4.712,1.905) 15(4.712,3.175) 16(4.712,4.445)
  silkscreen extent -5.68,-5.15 3.4,5.15
SOT230P700X180-4N [mm]
  rect 1.5x2 smd: 1(-2.3,-3.15) 2(0,-3.15) 3(2.3,-3.15)
  rect 3.8x2 smd: 4(0,3.15)
  silkscreen extent -3.6,-3.7 3.35,1.85, body extent -3.25,-3.5 3.25,3.5, height 1.8
SOT323-3L_STM [mil]
  rect 18x40 smd paste+0 mask+0: 1(-25.59,-41) 2(25.59,-41) 3(0,41)
  silkscreen extent -48,-87 48,32, body extent -44,-47 44,47, height 43
SRP7050TA-220M [mm]
  rect 2.95x3.5 smd: 1(-2.725,0) 2(2.725,0)
  silkscreen extent -4.4,-3.3 4.4,3.3, body extent -3.65,-3.3 3.65,3.3, height 4.6
TESTPOINT [mm]
  round 1.5 smd: 1(0,0)
  silkscreen extent -1,-1 1,1
TFBGA240+25 [mil]
  round 9 smd paste+0 mask+3: A1(-251.97,251.97) A2(-220.47,251.97) A3(-188.98,251.97) A4(-157.48,251.97) A5(-125.98,251.97) A6(-94.49,251.97) A7(-62.99,251.97) A8(-31.5,251.97) A9(0,251.97) A10(31.5,251.97) A11(62.99,251.97) A12(94.49,251.97) A13(125.98,251.97) A14(157.48,251.97) A15(188.98,251.97) A16(220.47,251.97) A17(251.97,251.97) B1(-251.97,220.47) B2(-220.47,220.47) B3(-188.98,220.47) B4(-157.48,220.47) B5(-125.98,220.47) B6(-94.49,220.47) B7(-62.99,220.47) B8(-31.5,220.47) B9(0,220.47) B10(31.5,220.47) B11(62.99,220.47) B12(94.49,220.47) B13(125.98,220.47) B14(157.48,220.47) B15(188.98,220.47) B16(220.47,220.47) B17(251.97,220.47) C1(-251.97,188.98) C2(-220.47,188.98) C3(-188.98,188.98) C4(-157.48,188.98) C5(-125.98,188.98) C6(-94.49,188.98) C7(-62.99,188.98) C8(-31.5,188.98) C9(0,188.98) C10(31.5,188.98) C11(62.99,188.98) C12(94.49,188.98) C13(125.98,188.98) C14(157.48,188.98) C15(188.98,188.98) C16(220.47,188.98) C17(251.97,188.98) D1(-251.97,157.48) D2(-220.47,157.48) D3(-188.98,157.48) D4(-157.48,157.48) D5(-125.98,157.48) D6(-94.49,157.48) D7(-62.99,157.48) D8(-31.5,157.48) D9(0,157.48) D10(31.5,157.48) D11(62.99,157.48) D12(94.49,157.48) D13(125.98,157.48) D14(157.48,157.48) D15(188.98,157.48) D16(220.47,157.48) D17(251.97,157.48) E1(-251.97,125.98) E2(-220.47,125.98) E3(-188.98,125.98) E4(-157.48,125.98) E5(-125.98,125.98) E6(-94.49,125.98) E7(-62.99,125.98) E8(-31.5,125.98) E9(0,125.98) E10(31.5,125.98) E11(62.99,125.98) E12(94.49,125.98) E13(125.98,125.98) E14(157.48,125.98) E15(188.98,125.98) E16(220.47,125.98) E17(251.97,125.98) F1(-251.97,94.49) F2(-220.47,94.49) F3(-188.98,94.49) F4(-157.48,94.49) F5(-125.98,94.49) F13(125.98,94.49) F14(157.48,94.49) F15(188.98,94.49) F16(220.47,94.49) F17(251.97,94.49) G1(-251.97,62.99) G2(-220.47,62.99) G3(-188.98,62.99) G4(-157.48,62.99) G5(-125.98,62.99) G7(-62.99,62.99) G8(-31.5,62.99) G9(0,62.99) G10(31.5,62.99) G11(62.99,62.99) G13(125.98,62.99) G14(157.48,62.99) G15(188.98,62.99) G16(220.47,62.99) G17(251.97,62.99) H1(-251.97,31.5) H2(-220.47,31.5) H3(-188.98,31.5) H4(-157.48,31.5) H5(-125.98,31.5) H7(-62.99,31.5) H8(-31.5,31.5) H9(0,31.5) H10(31.5,31.5) H11(62.99,31.5) H13(125.98,31.5) H14(157.48,31.5) H15(188.98,31.5) H16(220.47,31.5) H17(251.97,31.5) J1(-251.97,0) J2(-220.47,0) J3(-188.98,0) J4(-157.48,0) J5(-125.98,0) J7(-62.99,0) J8(-31.5,0) J9(0,0) J10(31.5,0) J11(62.99,0) J13(125.98,0) J14(157.48,0) J15(188.98,0) J16(220.47,0) J17(251.97,0) K1(-251.97,-31.5) K2(-220.47,-31.5) K3(-188.98,-31.5) K4(-157.48,-31.5) K5(-125.98,-31.5) K7(-62.99,-31.5) K8(-31.5,-31.5) K9(0,-31.5) K10(31.5,-31.5) K11(62.99,-31.5) K13(125.98,-31.5) K14(157.48,-31.5) K15(188.98,-31.5) K16(220.47,-31.5) K17(251.97,-31.5) L1(-251.97,-62.99) L2(-220.47,-62.99) L3(-188.98,-62.99) L4(-157.48,-62.99) L5(-125.98,-62.99) L7(-62.99,-62.99) L8(-31.5,-62.99) L9(0,-62.99) L10(31.5,-62.99) L11(62.99,-62.99) L13(125.98,-62.99) L14(157.48,-62.99) L15(188.98,-62.99) L16(220.47,-62.99) L17(251.97,-62.99) M1(-251.97,-94.49) M2(-220.47,-94.49) M3(-188.98,-94.49) M4(-157.48,-94.49) M5(-125.98,-94.49) M13(125.98,-94.49) M14(157.48,-94.49) M15(188.98,-94.49) M16(220.47,-94.49) M17(251.97,-94.49) N1(-251.97,-125.98) N2(-220.47,-125.98) N3(-188.98,-125.98) N4(-157.48,-125.98) N5(-125.98,-125.98) N6(-94.49,-125.98) N7(-62.99,-125.98) N8(-31.5,-125.98) N9(0,-125.98) N10(31.5,-125.98) N11(62.99,-125.98) N12(94.49,-125.98) N13(125.98,-125.98) N14(157.48,-125.98) N15(188.98,-125.98) N16(220.47,-125.98) N17(251.97,-125.98) P1(-251.97,-157.48) P2(-220.47,-157.48) P3(-188.98,-157.48) P4(-157.48,-157.48) P5(-125.98,-157.48) P6(-94.49,-157.48) P7(-62.99,-157.48) P8(-31.5,-157.48) P9(0,-157.48) P10(31.5,-157.48) P11(62.99,-157.48) P12(94.49,-157.48) P13(125.98,-157.48) P14(157.48,-157.48) P15(188.98,-157.48) P16(220.47,-157.48) P17(251.97,-157.48) R1(-251.97,-188.98) R2(-220.47,-188.98) R3(-188.98,-188.98) R4(-157.48,-188.98) R5(-125.98,-188.98) R6(-94.49,-188.98) R7(-62.99,-188.98) R8(-31.5,-188.98) R9(0,-188.98) R10(31.5,-188.98) R11(62.99,-188.98) R12(94.49,-188.98) R13(125.98,-188.98) R14(157.48,-188.98) R15(188.98,-188.98) R16(220.47,-188.98) R17(251.97,-188.98) T1(-251.97,-220.47) T2(-220.47,-220.47) T3(-188.98,-220.47) T4(-157.48,-220.47) T5(-125.98,-220.47) T6(-94.49,-220.47) T7(-62.99,-220.47) T8(-31.5,-220.47) T9(0,-220.47) T10(31.5,-220.47) T11(62.99,-220.47) T12(94.49,-220.47) T13(125.98,-220.47) T14(157.48,-220.47) T15(188.98,-220.47) T16(220.47,-220.47) T17(251.97,-220.47) U1(-251.97,-251.97) U2(-220.47,-251.97) U3(-188.98,-251.97) U4(-157.48,-251.97) U5(-125.98,-251.97) U6(-94.49,-251.97) U7(-62.99,-251.97) U8(-31.5,-251.97) U9(0,-251.97) U10(31.5,-251.97) U11(62.99,-251.97) U12(94.49,-251.97) U13(125.98,-251.97) U14(157.48,-251.97) U15(188.98,-251.97) U16(220.47,-251.97) U17(251.97,-251.97)
  Keep-Out Layer region: -285.22,-285.22 -285.22,285.22 285.22,285.22 285.22,-285.22
  silkscreen extent -288,-288 288,288, body extent -279,-279 279,279, height 43
TFBGA-90_8X13_ISI [mil]
  round 16 smd paste+0 mask+0: A1(-125.98,220.47) A2(-94.49,220.47) A3(-62.99,220.47) A7(62.99,220.47) A8(94.49,220.47) A9(125.98,220.47) B1(-125.98,188.98) B2(-94.49,188.98) B3(-62.99,188.98) B7(62.99,188.98) B8(94.49,188.98) B9(125.98,188.98) C1(-125.98,157.48) C2(-94.49,157.48) C3(-62.99,157.48) C7(62.99,157.48) C8(94.49,157.48) C9(125.98,157.48) D1(-125.98,125.98) D2(-94.49,125.98) D3(-62.99,125.98) D7(62.99,125.98) D8(94.49,125.98) D9(125.98,125.98) E1(-125.98,94.49) E2(-94.49,94.49) E3(-62.99,94.49) E7(62.99,94.49) E8(94.49,94.49) E9(125.98,94.49) F1(-125.98,62.99) F2(-94.49,62.99) F3(-62.99,62.99) F7(62.99,62.99) F8(94.49,62.99) F9(125.98,62.99) G1(-125.98,31.5) G2(-94.49,31.5) G3(-62.99,31.5) G7(62.99,31.5) G8(94.49,31.5) G9(125.98,31.5) H1(-125.98,0) H2(-94.49,0) H3(-62.99,0) H7(62.99,0) H8(94.49,0) H9(125.98,0) J1(-125.98,-31.5) J2(-94.49,-31.5) J3(-62.99,-31.5) J7(62.99,-31.5) J8(94.49,-31.5) J9(125.98,-31.5) K1(-125.98,-62.99) K2(-94.49,-62.99) K3(-62.99,-62.99) K7(62.99,-62.99) K8(94.49,-62.99) K9(125.98,-62.99) L1(-125.98,-94.49) L2(-94.49,-94.49) L3(-62.99,-94.49) L7(62.99,-94.49) L8(94.49,-94.49) L9(125.98,-94.49) M1(-125.98,-125.98) M2(-94.49,-125.98) M3(-62.99,-125.98) M7(62.99,-125.98) M8(94.49,-125.98) M9(125.98,-125.98) N1(-125.98,-157.48) N2(-94.49,-157.48) N3(-62.99,-157.48) N7(62.99,-157.48) N8(94.49,-157.48) N9(125.98,-157.48) P1(-125.98,-188.98) P2(-94.49,-188.98) P3(-62.99,-188.98) P7(62.99,-188.98) P8(94.49,-188.98) P9(125.98,-188.98) R1(-125.98,-220.47) R2(-94.49,-220.47) R3(-62.99,-220.47) R7(62.99,-220.47) R8(94.49,-220.47) R9(125.98,-220.47)
  Keep-Out Layer region: -159.23,-253.72 -159.23,253.72 159.23,253.72 159.23,-253.72
  silkscreen extent -170,-268 170,268, body extent -159,-258 159,258, height 47
TPL5010DDCR [mm]
  rrect25% 1.45x0.59 smd: 1(-1.155,0.95) 2(-1.155,0) 3(-1.155,-0.95) 4(1.155,-0.95) 5(1.155,0) 6(1.155,0.95)
  silkscreen extent -2.5,-1.57 0.8,1.57, body extent -1.4,-1.45 1.4,1.45, height 1.1
TSSOP8_SOT505-1_NXP [mil]
  rect 53.5x20 smd paste+0 mask+0: 1(-87.75,38.39) 2(-87.75,12.8) 3(-87.75,-12.8) 4(-87.75,-38.39) 5(87.75,-38.39) 6(87.75,-12.8) 7(87.75,12.8) 8(87.75,38.39)
  silkscreen extent -145,-66 66,66, body extent -101,-61 101,61, height 43
TVS_ESDA7P60-1U1M [mm]
  rect 0.55x0.8 smd: 1(-0.625,0) 2(0.625,0)
  silkscreen extent -1.6,-0.5 0.03,0.5
XTAL_MU00525_NDK [mil]
  rect 42x49 smd paste+0 mask+0: 1(-56,0) 2(56,0)
  silkscreen extent -30,-36 30,36, body extent -65,-31 65,31, height 35

## Part data
B1 B2: library part CMP-03407-000003-1, "SWITCH TACTILE SPST-NO 0.05A 24V", Contact Current Rating=50mA, Contact Resistance=100mΩ, Manufacturer="TE Connectivity", Operating Force=160gf, Package=0, Temperature="-35°C to +85°C", Temperature Range High=+85°C, Temperature Range Low=-35°C, Voltage Rating Dc=24V, Automotive=No, Category=Switch, Ciiva Ids=2672442, ComponentLink2Description=Datasheet, ComponentLink2URL=https://www.te.com/commerce/DocumentDelivery/DDEController?Action=showdoc&DocId=Customer+Drawing%7F2-1437565-7%7FV%7Fpdf%7FEnglish%7FENG_CD_2-1437565-7_V.pdf%7F4-1437565-1, Device Class L1=Electromechanical, Device Class L2=Switches, Device Class L3="Tactile Switches", Digikey Description="SWITCH TACTILE SPST-NO 0.05A 24V", Electromechanical Life=100000Cycles, Height=5.38mm, Import Ts=1521848451, Lead Free=Yes, Manufacturer Part Number=4-1437565-1, Mount="Surface Mount", Mouser Description="Switch Tactile OFF (ON) SPST Round Button Gull Wing 0.05A 12VDC 1.57N SMD Loose Piece", Octopart=https://octopart.com/fsm4jsma-te+connectivity-55488004, Release Date=1503379960, RoHS=TRUE, Standoff Height=0.05mm, Throw Configuration=SPST-NO
C1 C2 C3 C4 C5 C6 C7 C8 C9 C10 C11 C12 C13 C14 C15 C16 C17 C18 C19 C20 C21 C22 C23 C24 C25 C26 C27 C28 C29 C30 C31 C32 C33 C34 C35 C36 C37 C38 C39 C40 C41 C42 C43 C44 C49 C50 C52 C53 C54 C55 C56 C57 C58 C60 C61 C62 C63 C64 C65 C66 C67 C68 C69 C70 C71 C72 C73 C74 C75 C76 C77 C78 C79 C80 C81 C82 C83 C84 C85 C86 C88 C90 C91 C92 C93 C94 C95 C96 C97 C98 C99 C100 C101 C102 C103 C104 C105 C106 C107 C108 C109: library part CAP_SMD, "CAP_Chip"
C45 C46 C51 C59 C87 C89: library part _CAP_Pola_2, "CAP Polarization"
C47 C48: library part _CAP_C_2, "CAP CHIP"
CR1: "Automotive dual-line TVS in SOT323-3L for CAN bus (12 V system)", Manufacturer_Name=STMicroelectronics, Copyright="Copyright (C) 2025 Ultra Librarian. All rights reserved.", Manufacturer_Part_Number=ESDCAN02-2BWY, RefDes=RefDes, Type=Type
D1: library part CMP-2100-03685-1, "Schottky Barrier Rectifier, 40 V, 5 A, -55 to 150 degC, 2-Pin SMD", Manufacturer=JCET, Package Description="2-Pin Surface Mount Device, Body 4.315 x 3.62 mm", Package Reference=SMB-2, Datasheet URL=http://wiki.seeedstudio.com/images/3/3f/0310130P1.pdf, Datasheet Version=41395.0, Manufacturer URL=http://www.cj-elec.com/
DS1 DS4: library part MCD-02900, "LED, Green, 2V, 25mA, 0603, SMD", Manufacturer=EVERLIGHT, Manufacturer_Part_Number=19-213SYGC/S530-E2/5T, Package=0603, Component_Country_Of_Origin=China, ComponentLink1URL=http://tunmcdsvn.tun.st.com/Component_Documentation_Library/Trunk/Display/EVERLIGHT_19-213SYGC-S530-E2-5T, Full_Alternate_Internal_Part_Number=MCD-00320, ID=5016, Internal_Part_Number=MCD-02900, Order_Code_Digikey=1080-19-213SYGC/S530-E2/5TTR-ND, Order_Code_Farnell=N/A, Order_Code_RS=N/A, Part_Preference=Recommended, Part_Type=Display, Partial_Alternate_Internal_Part_Number=MCD-00050, ShowFields=YES, Status=Checked
DS2 DS3: library part MCD-02899, "LED, Red, VF : Min=1.75V , Max=2.35V, 25mA, 0603", Manufacturer=EVERLIGHT, Manufacturer_Part_Number=19-213/R6C-AP1Q2B/5T, Package=0603, Component_Country_Of_Origin=China, ComponentLink1URL=http://tunmcdsvn.tun.st.com/Component_Documentation_Library/Trunk/Display/EVERLIGHT_19-213-R6C-AP1Q2B-5T, Full_Alternate_Internal_Part_Number=MCD-00049, ID=5015, Internal_Part_Number=MCD-02899, Order_Code_Digikey=1080-19-213/R6C-AP1Q2B/5TTR-ND, Order_Code_Farnell=N/A, Order_Code_RS=N/A, Part_Preference=Recommended, Part_Type=Display, ShowFields=YES, Status=Checked
FB1 FB2: library part CMP-0686-00557-7, "Chip Ferrite Bead, 0603, 120Ω @ 100MHz, 0.05Ω, 25%, 2A", Case Code (Imperial)=0603, Case Code (Metric)=1608, Current Rating=2A, DC Resistance (DCR)=50mR, Frequency=100MHz, Max Operating Temperature=125°C, Min Operating Temperature=-55°C, Package Quantity=1, Tolerance=25%, Case/Package=0603, Core Material=Ferrite, DC Current=2A, Depth=0.8mm, Height=0.8mm, Impedance=120R, Lead Free="Lead Free", Length=1.6mm, Material=Steel, Max Current Rating=2A, Max DC Current=2A, Number of Circuits=1, Number of Lines=1, Number of Pins=2, Packaging="Tape and Reel", Radiation Hardening=No, REACH SVHC="No SVHC", RoHS Compliant=Yes, Shielding=Unshielded, Termination=SMD/SMT, Test Frequency=100MHz, Width=0.8mm
FB3: library part CMP-0686-00117-3, "Ferrite Bead, 0201, 33Ω @ 100MHz, 25%, 0.09Ω, 750mA", Case Code (Imperial)=0201, Case Code (Metric)=0603, Current Rating=750mA, DC Resistance (DCR)=90mR, Max Operating Temperature=125°C, Min Operating Temperature=-55°C, Package Quantity=1, Test Frequency=100MHz, Tolerance=25%, Case/Package=0201, Height=0.3mm, Impedance=33R, Lead Free="Lead Free", Length=0.6mm, Material=Steel, Max Current Rating=750mA, Max DC Current=750mA, Number of Circuits=1, Number of Lines=1, Number of Pins=2, Packaging="Tape and Reel", REACH SVHC="No SVHC", RoHS Compliant=Yes, Series=BLM03P, Termination=SMD/SMT, Width=0.3mm
FB4: library part CMP-0686-00581-3, "Chip Ferrite Bead, 0603, 600Ω @ 100MHz, 0.15Ω, 25%, 1.3A", Case Code (Imperial)=0603, Case Code (Metric)=1608, Current Rating=1.3A, DC Resistance (DCR)=150mR, Inductor Type="FERRITE BEAD", Max Operating Temperature=125°C, Min Operating Temperature=-55°C, Package Quantity=1, Test Frequency=100MHz, Tolerance=25%, Case/Package=0603, Core Material=Ferrite, DC Current=1.3A, Depth=0.8mm, Height=0.8mm, Impedance=600R, Lead Free="Lead Free", Length=1.6mm, Material=Steel, Max Current Rating=1.3A, Max DC Current=1.3A, Military Standard=Not, Number of Circuits=1, Number of Lines=1, Number of Pins=2, Packaging="Tape and Reel", Radiation Hardening=No, REACH SVHC="No SVHC", RoHS Compliant=Yes, Series=BLM18K, Termination=SMD/SMT, Weight=7.1E-05oz, Width=0.8mm
J1: "RightAngle SMT TypeABVersion 2.0 Micro USB Conn Skt,30Vac,1.8A 47650 MICRO-USB", Package=None, Check_prices=https://www.snapeda.com/parts/47590-0001/Molex/view-part/?ref=eda, MF=Molex, MP=47590-0001, SnapEDA_Link=https://www.snapeda.com/parts/47590-0001/Molex/view-part/?ref=snap
J2 J3 J9: "Connector Header Surface Mount, Right Angle 9 position 0.059\" (1.50mm)"
J4: "1.50mm Pitch, Pico-Lock PCB Header, Single Row, Right-Angle, Surface Mount, Gold (Au) Plating, Positive Lock, 5 Circuits, Tape and Reel", Manufacturer_Name="Molex Connector Corporation", Copyright="Copyright (C) 2025 Ultra Librarian. All rights reserved.", Manufacturer_Part_Number=5040500591, RefDes=RefDes, Type=Type
J5: "pads for STLink V3 minie"
J6: "WR-PHD Pin Header, THT, Vertical, pitch 2.54mm, 2 Row, 10P", Contact Resistance=20mOhm, Manufacturer="Wurth Elektronik", Operating Temperature Max=105°C, Operating Temperature Min=-40°C, Rated Current=3A, Withstanding Voltage=500V, Working Voltage=250V, Category="Board-to-Board Connectors", ComponentLink1Description="Website Link", ComponentLink1URL=https://www.we-online.com/redexpert/article/61301021121?ad, ComponentLink2Description="Datasheet Link", ComponentLink2URL=https://www.we-online.com/redexpert/spec/61301021121?ad, Gender="Pin Header", Manufacturer Part Number=61301021121, Match Code=WR-PHD, Mount="Through Hole", Number of Pins=10, Number Of Rows=2, Orientation=Vertical, Packaging=Bag, Pitch=2.54mm
J7 J8: "PC / 104 Connectors Elevated Socket Strip"
J10: library part CMP-02766-000084-1, "CONN HEADER VERT 2POS 2.54MM", Current Rating=6.3A, Manufacturer=Samtec, Temperature="-55°C to +125°C", Temperature Range High=+125°C, Temperature Range Low=-55°C, Voltage Rating=550V, Automotive=No, Category=Conn, ComponentLink2Description=Datasheet, ComponentLink2URL=http://suddendocs.samtec.com/catalog_english/tsw_th.pdf, Conn Gender=Male, Conn Orientation=Straight, Contact Material=Gold,Nickel, Device Class L1=Connectors, Device Class L2="Headers and Wire Housings", Device Class L3=unset, Digikey Description="CONN HEADER VERT 2POS 2.54MM", Footprint Url=http://suddendocs.samtec.com/prints/tsw-xxx-xx-x-x-xx-xxx-footprint.pdf, Height=8.71mm, Lead Free=Yes, Manufacturer Part Number=TSW-102-07-G-S, Mouser Description="Conn Unshrouded Header HDR 2 POS 2.54mm Solder ST Thru-Hole Automotive Bulk", Number Of Contacts=2, Number Of Rows=1, Octopart=https://octopart.com/tsw-102-07-g-s-samtec-272197, Package=TSW-102-07-G-S, Pitch=2.54mm, RoHS=TRUE
L1: library part _IND, "FIXED IND 22UH 2.5A 170 MOHM SMD"
L2: library part _IND, "FIXED IND 10UH 300MA 600MOHM SMD"
R1 R2 R3 R4 R5 R6 R7 R8 R9 R10 R11 R12 R13 R14 R15 R16 R17 R18 R19 R20 R21 R22 R23 R24 R25 R26 R27 R28 R29 R30 R31 R32 R33 R34 R35 R36 R37 R38 R39 R40 R41 R42 R43 R44 R45 R46 R47 R48 R49 R50 R51 R52 R53 R54 R55 R56 R57 R58 R59 R60 R61 R62 R63 R64 R65 R66 R67 R68 R69 R70 R71 R72 R73 R74 R75 R76 R77 R78 R79 R80 R81 R82 R83 R84 R85 R86 R87 R88 R89 R90 R91 R92 R93 R94 R95 R96 R97 R98 R99 R100 R101 R102 R103 R104 R105 R107 R108 R109 R111 R112 R113 R114 R115 R116 R120 R121 R122 R123 R124 R125 R126 R127 R128 R129 R130 R131 R132 R133 R134 R135 R136 R137 R138 R139 R140 R141 R142 R143 R144 R145 R146 R147 R148 R149 R150 R151 R152 R153 R156 R157 R158 R159 R160 R161 R162 R163 R164 R165 R166 R167 R168 R169 R170 R171 R172 R173 R174 R175 R176 R177 R178 R179 R180 R181 R182 R183 R184 R185 R186 R187 R188 R189 R190 R191 R192 R193 R194 R195 R196 R197 R198 R199 R200 R201 R202 R203 R204 R205: library part _RES_B_2, "RES"
R106 R110 R155: library part _RES_B_2, "RES, 47R. 0603"
R117 R118 R119: library part _RES_B_2, "RES, 0603"
R154: library part _RES_B_2, "RES, 470R. 0603"
TP1 TP2 TP3 TP4: library part MCD-00630, "Test Point 0.3mm", Manufacturer=N/A, Manufacturer_HQ_COO=Unknown, Component_Country_Of_Origin=Unknown, ComponentLink1URL=http://tunmcdsvn.tun.st.com/Component_Documentation_Library/Trunk, ECCN_EU=n/a, ECCN_US=n/a, ID=3115, Initial_Board_Reference=MB1264, Internal_Part_Number=MCD-00630, Manufacturer_Part_Number=N/A, Order_Code_Digikey=N/A, Order_Code_Farnell=N/A, Order_Code_RS=N/A, Part_Preference=Recommended, Part_Type=Misc, Provided_By=n/a, ShowFields=YES, Status=Released
TVS1: "TVS DIODE 3VWM 4FLIPCHIP", Manufacturer_Name=STMicroelectronics, Copyright="Copyright (C) 2025 Ultra Librarian. All rights reserved.", Manufacturer_Part_Number=USBULC6-2F3, RefDes=RefDes, Type=Type
U1: "NAND Flash Serial e-MMC 3.3V 32G-bit 32G/8G/4G x 1/4-bit/8-bit 13.7ns 153-Pin WFBGA", Manufacturer_Name="KIOXIA Corporation", Mouser Part Number=757-THGBMTG5D1LBAIL, Arrow Part Number=THGBMTG5D1LBAIL, Arrow Price/Stock=null?region=nac, Datasheet Link=https://static6.arrow.com/aropdfconversion/5b79d7e5222d5200711a0ed1082b7aa51b6d9eb4/xia_thgbmtg5d1lbail15nm4gbe-mmcver5.0_e_rev.1.0_20211007.pdf, Geometry.Height=0.8mm, Manufacturer_Part_Number=THGBMTG5D1LBAIL, Mouser Price/Stock=https://www.mouser.co.uk/ProductDetail/Kioxia-America/THGBMTG5D1LBAIL?qs=Znm5pLBrcAKPRFVhV%252B0AbQ%3D%3D
U2 U3: "IC FLASH 512MBIT 133MHZ 16SO", Arrow Part Number=MT25QL512ABB8ESF-0SIT, Manufacturer_Name=Micron, Mouser Part Number=340-278183-TRAY, Arrow Price/Stock=https://www.arrow.com/en/products/mt25ql512abb8esf-0sit/micron-technology?utm_currency=USD&region=nac, Datasheet Link=https://datasheet.datasheetarchive.com/originals/distributors/DKDS42/DSANUWW0045437.pdf, Geometry.Height=2.65mm, Manufacturer_Part_Number=MT25QL512ABB8ESF-0SIT, Mouser Price/Stock=https://www.mouser.co.uk/ProductDetail/Micron/MT25QL512ABB8ESF-0SIT?qs=rrS6PyfT74e8sADX0P8kAw%3D%3D
U4: library part MCD-04225, "Memory, SDRAM, 3V3, 128Mbit, 166MHz", Manufacturer=ISSI, Manufacturer_Part_Number=IS42S32400J-6BL, Package=TFBGA-90, Component_Country_Of_Origin=Unknown, ComponentLink1URL=http://tunmcdsvn.tun.st.com/Component_Documentation_Library/Trunk/IC/ISSI_IS42S32400J-6BL\, ID=6341, Internal_Part_Number=MCD-04225, Order_Code_Digikey=706-IS42S32400J-6BL-ND, Order_Code_Farnell=N/A, Order_Code_RS=N/A, Part_Preference=Recommended, Part_Type=IC, ShowFields=YES, Status=Checked
U5: library part MCD-01085, "32bit MCU TFBGA240+25", Manufacturer=STMICROELECTRONICS, Manufacturer_HQ_COO=EU, Manufacturer_Part_Number=STM32H745XIH6, Package=TFBGA-265, BMS_Part_Number=9175307, Component_Country_Of_Origin=Philippines, ComponentLink1Description=Datasheet, ComponentLink1URL=http://tunmcdsvn.tun.st.com/Component_Documentation_Library/Trunk/IC/STMICROELECTRONICS_STM32H745x, ID=3408, Initial_Board_Reference=MB1381, Internal_Part_Number=MCD-01085, Order_Code_Digikey=497-19502-ND, Order_Code_Farnell=3365366, Order_Code_RS=N/A, Part_Preference=Recommended, Part_Type=IC, Provided_By=STM, ShowFields=YES, Status=Checked
U6 U7: library part MCD-00251, "High power transient voltage suppressor, 7V breakdown", Manufacturer=STMICROELECTRONICS, Manufacturer_HQ_COO=EU, Manufacturer_Part_Number=ESDA7P60-1U1M, Package=QFN1610, BMS_Part_Number=9179042, Component_Country_Of_Origin=China, ComponentLink1Description=STM_ESD_ESDA7P60-1U1M.pdf, ComponentLink1URL=http://tunmcdsvn.tun.st.com/Component_Documentation_Library/Trunk/Diode/STMICROELECTRONICS_ESDA7P60-1U1M, ECCN_EU=NEC, ECCN_US=EAR99, ID=2618, Initial_Board_Reference=MB1311, Internal_Part_Number=MCD-00251, Order_Code_Digikey=497-16253-2-ND, Order_Code_Farnell=N/A, Order_Code_RS=110-6381, Part_Preference=Recommended, Part_Type=Diode, Provided_By=Subcon, ShowFields=YES, Status=Released
U8: "IC TRANSCEIVER HALF 1/1 32QFN"
U9: "3.3 V CAN Transceiver with Standby Mode", Package="SOIC-8 Texas Instruments", Check_prices=https://www.snapeda.com/parts/SN65HVD230DR/Texas+Instruments/view-part/?ref=eda, MF="Texas Instruments", MP=SN65HVD230DR, SnapEDA_Link=https://www.snapeda.com/parts/SN65HVD230DR/Texas+Instruments/view-part/?ref=snap
U10 U11: "Automotive LVDS Differential Driver"
U14: "5.5V to 36V Input, 3A, 500kHz Step-Down Converter", Package="HSOIC-8 Texas Instruments", Availability="In Stock", Check_prices=https://www.snapeda.com/parts/TPS5430DDAR/Texas+Instruments/view-part/?ref=eda, MF="Texas Instruments", MP=TPS5430DDAR, Price=None, Purchase-URL=https://pricing.snapeda.com/search/part/TPS5430DDAR/?ref=eda, SnapEDA_Link=https://www.snapeda.com/parts/TPS5430DDAR/Texas+Instruments/view-part/?ref=snap
U15: "1.5-A, 20-V, ultra-low-dropout voltage regulator with reverse current protection & enable 6-SOT-223 -40 to 125", Manufacturer_Name="Texas Instruments", Copyright="Copyright (C) 2025 Ultra Librarian. All rights reserved.", Datasheet=https://www.ti.com/lit/gpn/tps7a45, Manufacturer_Part_Number=TPS7A4533DCQR, RefDes=RefDes, Type=TYPE
U16: library part MCD-01070, "Adjustable and fixed low drop positive voltage regulator", Manufacturer=STMICROELECTRONICS, Manufacturer_HQ_COO=EU, Manufacturer_Part_Number=LD1117S18TR, Package=SOT-223, BMS_Part_Number=9176180, Component_Country_Of_Origin=China, ComponentLink1Description=STM_LDO_LD1117S18TR.pdf, ComponentLink1URL=http://tunmcdsvn.tun.st.com/Component_Documentation_Library/Trunk/IC/STMICROELECTRONICS_LD1117S18TR, ECCN_EU=NEC, ECCN_US=EAR99, ID=3422, Initial_Board_Reference=MB1381, Internal_Part_Number=MCD-01070, Order_Code_Digikey=497-7308-2-ND, Order_Code_Farnell=3367145, Order_Code_RS=686-9375, Part_Preference=Recommended, Part_Type=IC, Provided_By=Subcon, ShowFields=YES, Status=Checked
U17: "No Description Available", Manufacturer_Name=NXP, Copyright="Copyright (C) 2025 Ultra Librarian. All rights reserved.", Manufacturer_Part_Number=PCA9508DP,118, RefDes=RefDes, Type=Type
U18: "No Description Available", Manufacturer_Name=ISSI, Copyright="Copyright (C) 2025 Ultra Librarian. All rights reserved.", Manufacturer_Part_Number=IS66WVS4M8BLL-104NLI, RefDes=RefDes, Type=Memory
U19: "OSC PROG TIMER TSOT23-6"
X1: "32.768 kHz ±20ppm Crystal 12.5pF 70 kOhms 2-SMD, No Lead", Manufacturer_Name=NDK, Copyright="Copyright (C) 2025 Ultra Librarian. All rights reserved.", Manufacturer_Part_Number=MU00525-32.768K, Type=Crystals
X2: "25 MHz XO (Standard) CMOS Oscillator 3.3V Standby (Power Down) 4-SMD, No Lead", Manufacturer_Name=NDK, Manufacturer_Part_Number=NSC5004A-25M, Copyright="Copyright (C) 2025 Ultra Librarian. All rights reserved.", RefDes=RefDes, Type=Oscillators
X3: library part NSC5004D-25M, "XTAL OSC XO 24.0000MHZ CMOS SMD", Manufacturer_Name=NDK, Manufacturer_Part_Number=NSC5004A-25M, Copyright="Copyright (C) 2025 Ultra Librarian. All rights reserved.", RefDes=RefDes, Type=Oscillators